# EAGLE board print (EAGLE 5.11)
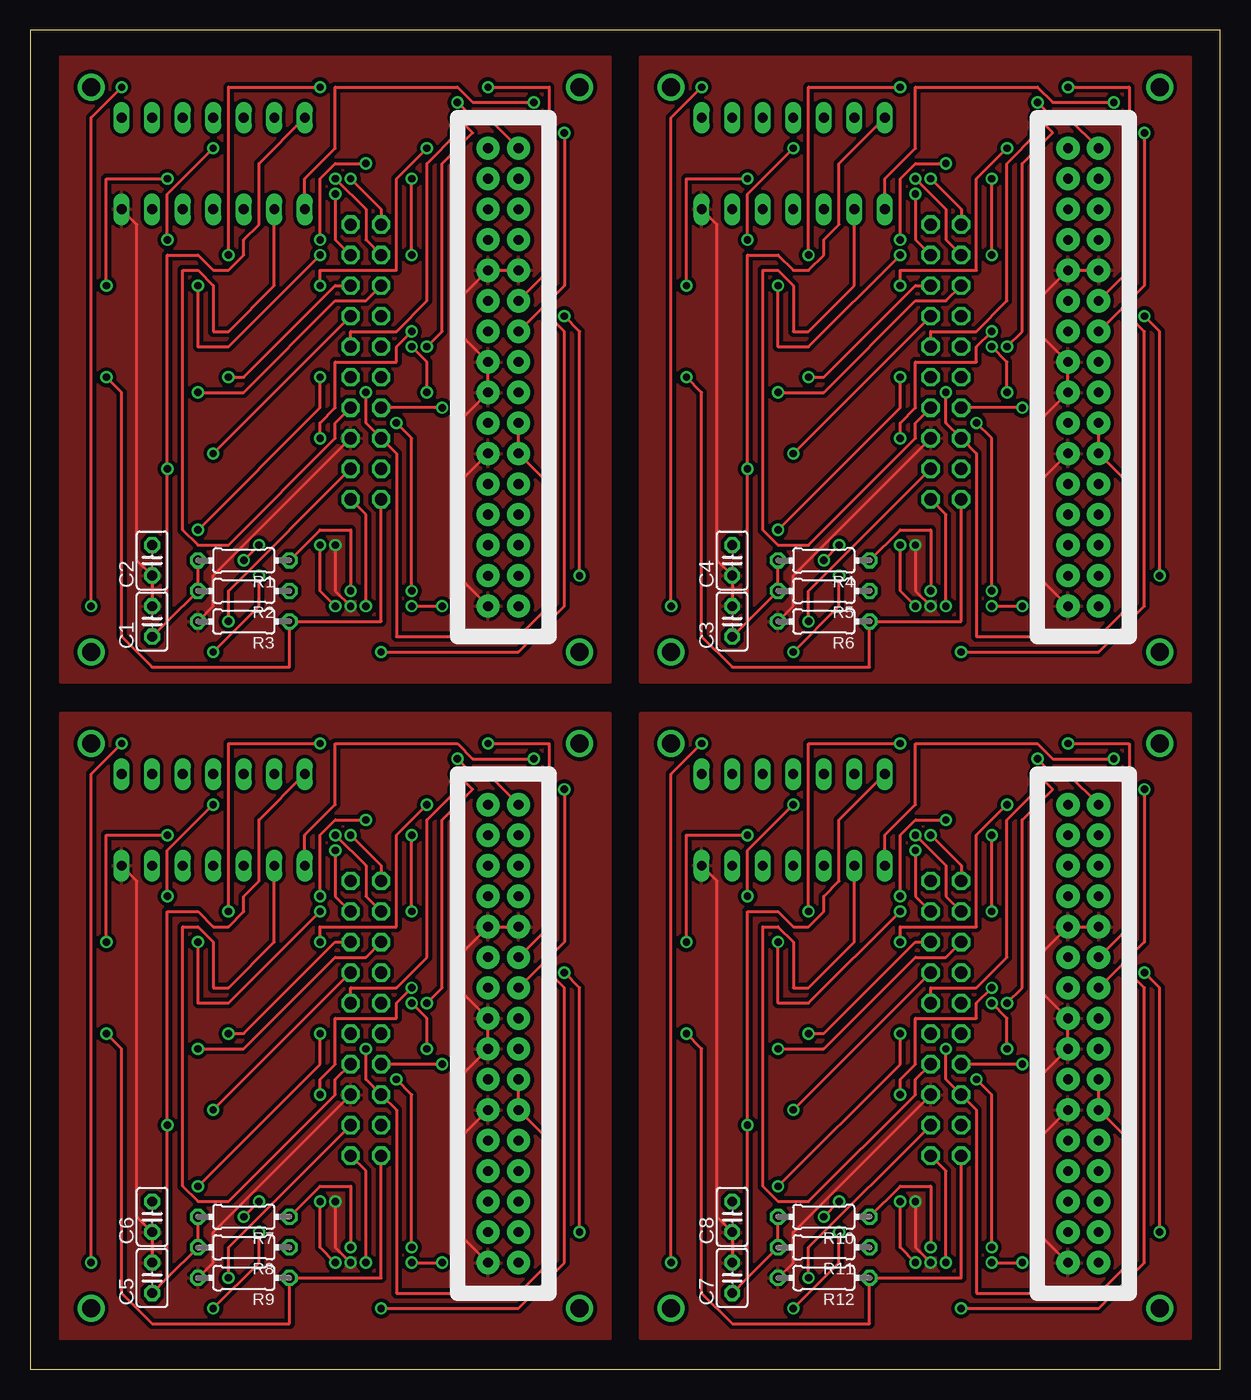
[diagram p0: board, top side]
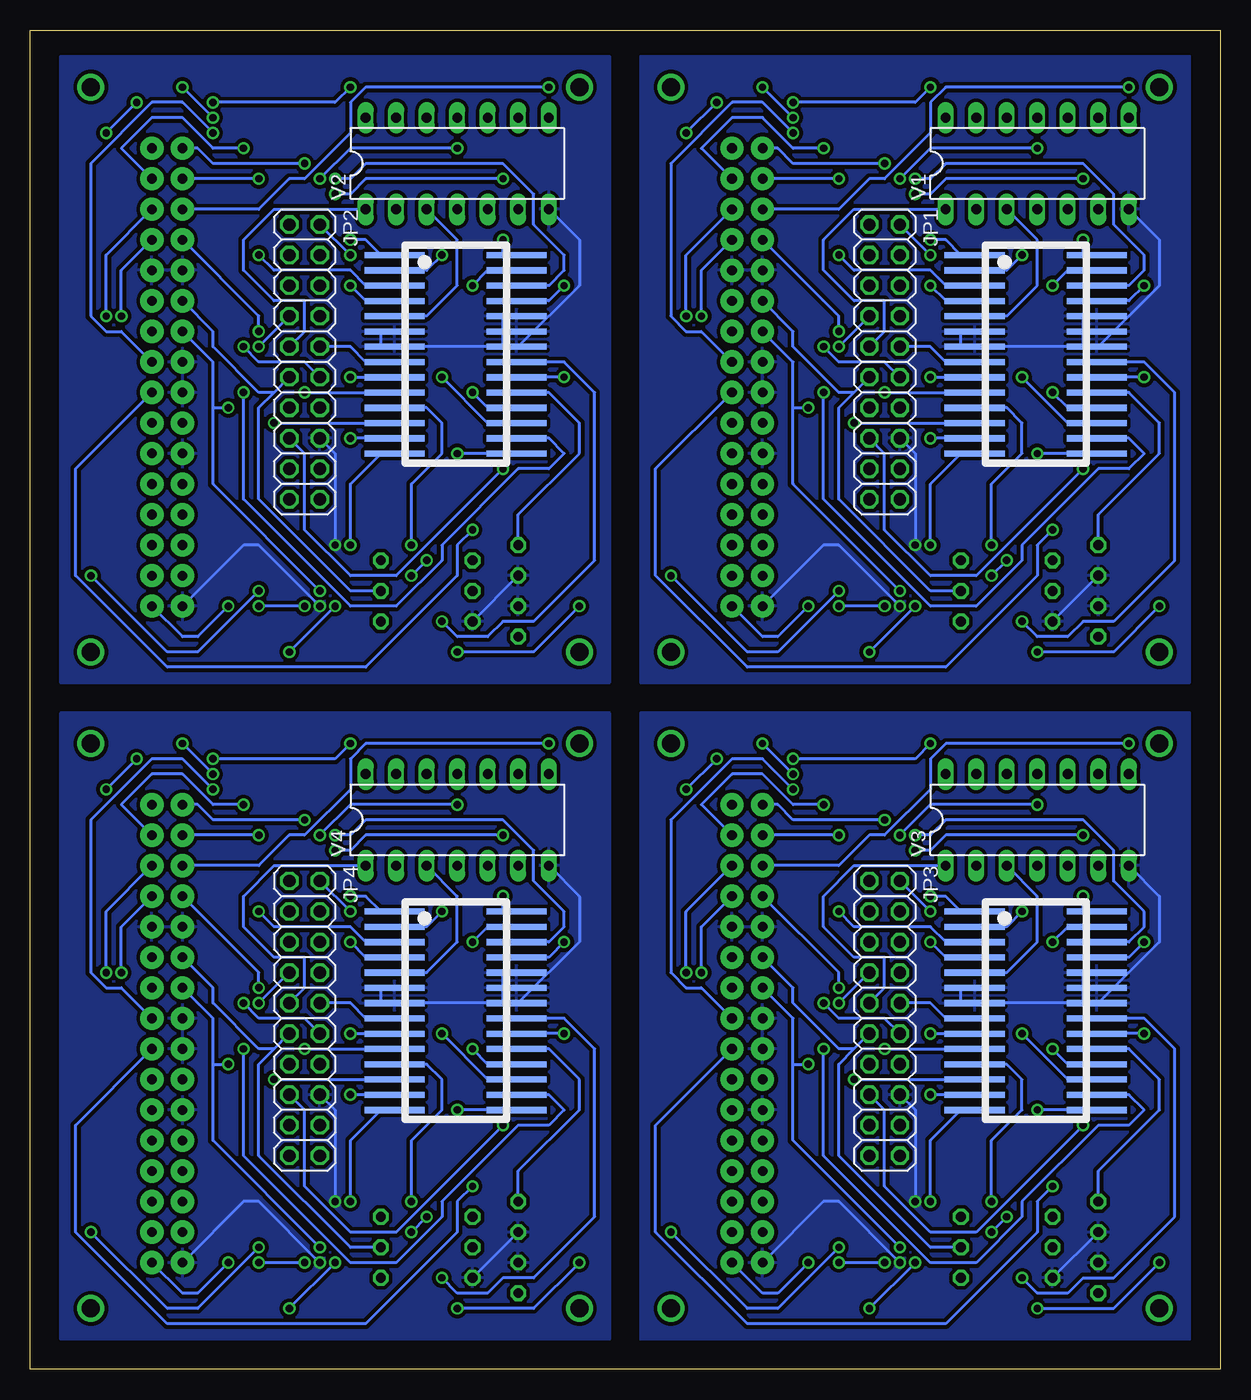
[diagram p1: board, bottom side, seen from below]

Size 99.04 x 111.43 mm. Coordinates in mm from the lower left corner, seen from the top.
Outline: 0,0 99.04,0 99.04,111.43 0,111.43 0,0
Copper layers (1*16): Top 0.035mm / dielectric 1.5mm / Bottom 0.035mm
Design rules "default": minimum track width 10mil, minimum drill 24mil, track to track 8mil, track to pad 8mil, pad to pad 8mil, via to via 8mil, smd to smd 8mil, copper to edge 40mil, drill to drill 8mil, minimum pad ring 10mil, minimum via ring 8mil, stop-mask expansion 4mil, vias tented up to drill 0mil, thermal gap 10mil

## Footprints (pad centres in the part's own frame; a part is rotated, then mirrored left to right if it is on the bottom)
C025-025X050 = drill 0.813 octagon: 1 -1.27,0; 2 1.27,0
2X10 = drill 1.016 octagon: 1 -11.43,-1.27; 2 -11.43,1.27; 3 -8.89,-1.27; 4 -8.89,1.27; 5 -6.35,-1.27; 6 -6.35,1.27; 7 -3.81,-1.27; 8 -3.81,1.27; 9 -1.27,-1.27; 10 -1.27,1.27; 11 1.27,-1.27; 12 1.27,1.27; 13 3.81,-1.27; 14 3.81,1.27; 15 6.35,-1.27; 16 6.35,1.27; 17 8.89,-1.27; 18 8.89,1.27; 19 11.43,-1.27; 20 11.43,1.27
0204/7 = drill 0.813 octagon: 1 -3.81,0; 2 3.81,0
AL422 = smd 5 x 0.51: 1 -5.21,7.61; 2 -5.21,6.34; 3 -5.21,5.07; 4 -5.21,3.8; 5 -5.21,2.53; 6 -5.21,1.26; 7 -5.21,-0.01; 8 -5.21,-1.28; 9 -5.21,-2.55; 10 -5.21,-3.82; 11 -5.21,-5.09; 12 -5.21,-6.36; 13 -5.21,-7.63; 14 -5.21,-8.9; 15 4.95,-8.9; 16 4.95,-7.63; 17 4.95,-6.36; 18 4.95,-5.09; 19 4.95,-3.82; 20 4.95,-2.55; 21 4.95,-1.28; 22 4.95,-0.01; 23 4.95,1.26; 24 4.95,2.53; 25 4.95,3.8; 26 4.95,5.07; 27 4.95,6.34; 28 4.95,7.61
C3088MODULE = drill 0.8 pad 1.93 round: P$1 -1.27,19.05; P$2 1.27,19.05; P$3 -1.27,16.51; P$4 1.27,16.51; P$5 -1.27,13.97; P$6 1.27,13.97; P$7 -1.27,11.43; P$8 1.27,11.43; P$9 -1.27,8.89; P$10 1.27,8.89; P$11 -1.27,6.35; P$12 1.27,6.35; P$13 -1.27,3.81; P$14 1.27,3.81; P$15 -1.27,1.27; P$16 1.27,1.27; P$17 -1.27,-1.27; P$18 1.27,-1.27; P$19 -1.27,-3.81; P$20 1.27,-3.81; P$21 -1.27,-6.35; P$22 1.27,-6.35; P$23 -1.27,-8.89; P$24 1.27,-8.89; P$25 -1.27,-11.43; P$26 1.27,-11.43; P$27 -1.27,-13.97; P$28 1.27,-13.97; P$29 -1.27,-16.51; P$30 1.27,-16.51; P$31 -1.27,-19.05; P$32 1.27,-19.05
DIL14 = drill 0.813 long: 1 -7.62,-3.81; 2 -5.08,-3.81; 3 -2.54,-3.81; 4 0,-3.81; 5 2.54,-3.81; 6 5.08,-3.81; 7 7.62,-3.81; 8 7.62,3.81; 9 5.08,3.81; 10 2.54,3.81; 11 0,3.81; 12 -2.54,3.81; 13 -5.08,3.81; 14 -7.62,3.81

## Placement (x,y rotation side)
C1  0.1uf  [C025-025X050]  10.16,62.23 90 top
C2  22uf  [C025-025X050]  10.16,67.31 90 top
C3  0.1uf  [C025-025X050]  58.42,62.23 90 top
C4  22uf  [C025-025X050]  58.42,67.31 90 top
C5  0.1uf  [C025-025X050]  10.16,7.62 90 top
C6  22uf  [C025-025X050]  10.16,12.7 90 top
C7  0.1uf  [C025-025X050]  58.42,7.62 90 top
C8  22uf  [C025-025X050]  58.42,12.7 90 top
JP1  [2X10]  27.94,83.82 270 bottom
JP2  [2X10]  76.2,83.82 270 bottom
JP3  [2X10]  27.94,29.21 270 bottom
JP4  [2X10]  76.2,29.21 270 bottom
R1  4k7  [0204/7]  17.78,67.31 180 top
R2  4k7  [0204/7]  17.78,64.77 180 top
R3  1k  [0204/7]  17.78,62.23 180 top
R4  4k7  [0204/7]  66.04,67.31 180 top
R5  4k7  [0204/7]  66.04,64.77 180 top
R6  1k  [0204/7]  66.04,62.23 180 top
R7  4k7  [0204/7]  17.78,12.7 180 top
R8  4k7  [0204/7]  17.78,10.16 180 top
R9  1k  [0204/7]  17.78,7.62 180 top
R10  4k7  [0204/7]  66.04,12.7 180 top
R11  4k7  [0204/7]  66.04,10.16 180 top
R12  1k  [0204/7]  66.04,7.62 180 top
U$1  AL422B  [AL422]  15.24,85.09 0 bottom
U$2  C3088MODULE  [C3088MODULE]  39.37,82.55 0 top
U$3  AL422B  [AL422]  63.5,85.09 0 bottom
U$4  C3088MODULE  [C3088MODULE]  87.63,82.55 0 top
U$5  AL422B  [AL422]  15.24,30.48 0 bottom
U$6  C3088MODULE  [C3088MODULE]  39.37,27.94 0 top
U$7  AL422B  [AL422]  63.5,30.48 0 bottom
U$8  C3088MODULE  [C3088MODULE]  87.63,27.94 0 top
V1  74HCT00N  [DIL14]  15.24,100.33 0 bottom
V2  74HCT00N  [DIL14]  63.5,100.33 0 bottom
V3  74HCT00N  [DIL14]  15.24,45.72 0 bottom
V4  74HCT00N  [DIL14]  63.5,45.72 0 bottom

## Library data of the parts
C1-C8 R1-R12 = rcl
JP1-JP4 = pinhead
U$1-U$8 = Tugas-Akhir-Sistem-Mikroprossesor
V1-V4 = 74ttl-din

## Nets
/FIFO_READ_RESET: JP1.18 U$1.21
/FIFO_READ_RESET1: JP2.18 U$3.21
/FIFO_READ_RESET2: JP3.18 U$5.21
/FIFO_READ_RESET3: JP4.18 U$7.21
DATA0: U$1.1 U$2.P$1
DATA1: U$1.2 U$2.P$2
DATA2: U$1.3 U$2.P$3
DATA3: U$1.4 U$2.P$4
DATA4: U$1.11 U$2.P$5
DATA5: U$1.12 U$2.P$6
DATA6: U$1.13 U$2.P$7
DATA7: U$1.14 U$2.P$8
DATA8: U$3.1 U$4.P$1
DATA9: U$3.2 U$4.P$2
DATA10: U$3.3 U$4.P$3
DATA11: U$3.4 U$4.P$4
DATA12: U$3.11 U$4.P$5
DATA13: U$3.12 U$4.P$6
DATA14: U$3.13 U$4.P$7
DATA15: U$3.14 U$4.P$8
DATA16: U$5.1 U$6.P$1
DATA17: U$5.2 U$6.P$2
DATA18: U$5.3 U$6.P$3
DATA19: U$5.4 U$6.P$4
DATA20: U$5.11 U$6.P$5
DATA21: U$5.12 U$6.P$6
DATA22: U$5.13 U$6.P$7
DATA23: U$5.14 U$6.P$8
DATA24: U$7.1 U$8.P$1
DATA25: U$7.2 U$8.P$2
DATA26: U$7.3 U$8.P$3
DATA27: U$7.4 U$8.P$4
DATA28: U$7.11 U$8.P$5
DATA29: U$7.12 U$8.P$6
DATA30: U$7.13 U$8.P$7
DATA31: U$7.14 U$8.P$8
FIFO_DATA_OUT0: JP1.1 U$1.28
FIFO_DATA_OUT1: JP1.2 U$1.27
FIFO_DATA_OUT2: JP1.3 U$1.26
FIFO_DATA_OUT3: JP1.4 U$1.25
FIFO_DATA_OUT4: JP1.5 U$1.18
FIFO_DATA_OUT5: JP1.6 U$1.17
FIFO_DATA_OUT6: JP1.7 U$1.16
FIFO_DATA_OUT7: JP1.8 U$1.15
FIFO_DATA_OUT8: JP2.1 U$3.28
FIFO_DATA_OUT9: JP2.2 U$3.27
FIFO_DATA_OUT10: JP2.3 U$3.26
FIFO_DATA_OUT11: JP2.4 U$3.25
FIFO_DATA_OUT12: JP2.5 U$3.18
FIFO_DATA_OUT13: JP2.6 U$3.17
FIFO_DATA_OUT14: JP2.7 U$3.16
FIFO_DATA_OUT15: JP2.8 U$3.15
FIFO_DATA_OUT16: JP3.1 U$5.28
FIFO_DATA_OUT17: JP3.2 U$5.27
FIFO_DATA_OUT18: JP3.3 U$5.26
FIFO_DATA_OUT19: JP3.4 U$5.25
FIFO_DATA_OUT20: JP3.5 U$5.18
FIFO_DATA_OUT21: JP3.6 U$5.17
FIFO_DATA_OUT22: JP3.7 U$5.16
FIFO_DATA_OUT23: JP3.8 U$5.15
FIFO_DATA_OUT24: JP4.1 U$7.28
FIFO_DATA_OUT25: JP4.2 U$7.27
FIFO_DATA_OUT26: JP4.3 U$7.26
FIFO_DATA_OUT27: JP4.4 U$7.25
FIFO_DATA_OUT28: JP4.5 U$7.18
FIFO_DATA_OUT29: JP4.6 U$7.17
FIFO_DATA_OUT30: JP4.7 U$7.16
FIFO_DATA_OUT31: JP4.8 U$7.15
FIFO_READ_CLOCK: JP1.19 R3.1 U$1.20
FIFO_READ_CLOCK1: JP2.19 R6.1 U$3.20
FIFO_READ_CLOCK2: JP3.19 R9.1 U$5.20
FIFO_READ_CLOCK3: JP4.19 R12.1 U$7.20
FIFO_WRITE_ENABLE: JP1.14 V1.2
FIFO_WRITE_ENABLE1: JP2.14 V2.2
FIFO_WRITE_ENABLE2: JP3.14 V3.2
FIFO_WRITE_ENABLE3: JP4.14 V4.2
GND: C1.2 C2.1 JP1.16 R3.2 U$1.6 U$1.7 U$1.22 U$1.23 U$1.24 U$2.P$9 U$2.P$10 U$2.P$15 U$2.P$17 U$2.P$21 U$2.P$31 V1.7
GND1: C3.2 C4.1 JP2.16 R6.2 U$3.6 U$3.7 U$3.22 U$3.23 U$3.24 U$4.P$9 U$4.P$10 U$4.P$15 U$4.P$17 U$4.P$21 U$4.P$31 V2.7
GND2: C5.2 C6.1 JP3.16 R9.2 U$5.6 U$5.7 U$5.22 U$5.23 U$5.24 U$6.P$9 U$6.P$10 U$6.P$15 U$6.P$17 U$6.P$21 U$6.P$31 V3.7
GND3: C7.2 C8.1 JP4.16 R12.2 U$7.6 U$7.7 U$7.22 U$7.23 U$7.24 U$8.P$9 U$8.P$10 U$8.P$15 U$8.P$17 U$8.P$21 U$8.P$31 V4.7
HORIZONTAL_REFERENCE: JP1.9 U$2.P$14 V1.1
HORIZONTAL_REFERENCE1: JP2.9 U$4.P$14 V2.1
HORIZONTAL_REFERENCE2: JP3.9 U$6.P$14 V3.1
HORIZONTAL_REFERENCE3: JP4.9 U$8.P$14 V4.1
N$1: JP1.20 U$2.P$32
N$2: U$1.5 V1.3
N$3: U$1.9 U$2.P$18
N$10: C2.2 U$1.19
N$11: U$3.5 V2.3
N$12: U$3.9 U$4.P$18
N$13: C4.2 U$3.19
N$14: JP2.20 U$4.P$32
N$21: U$5.5 V3.3
N$22: U$5.9 U$6.P$18
N$23: C6.2 U$5.19
N$24: JP3.20 U$6.P$32
N$31: U$7.5 V4.3
N$32: U$7.9 U$8.P$18
N$33: C8.2 U$7.19
N$34: JP4.20 U$8.P$32
OV6620_FODD: JP1.12 U$2.P$12
OV6620_FODD1: JP2.12 U$4.P$12
OV6620_FODD2: JP3.12 U$6.P$12
OV6620_FODD3: JP4.12 U$8.P$12
OV6620_SCL: JP1.13 R1.1 U$2.P$13
OV6620_SCL1: JP2.13 R4.1 U$4.P$13
OV6620_SCL2: JP3.13 R7.1 U$6.P$13
OV6620_SCL3: JP4.13 R10.1 U$8.P$13
OV6620_SDA: JP1.11 R2.1 U$2.P$11
OV6620_SDA1: JP2.11 R5.1 U$4.P$11
OV6620_SDA2: JP3.11 R8.1 U$6.P$11
OV6620_SDA3: JP4.11 R11.1 U$8.P$11
VCC: C1.1 JP1.15 R1.2 R2.2 U$1.10 U$2.P$20 U$2.P$22 V1.14
VCC1: C3.1 JP2.15 R4.2 R5.2 U$3.10 U$4.P$20 U$4.P$22 V2.14
VCC2: C5.1 JP3.15 R7.2 R8.2 U$5.10 U$6.P$20 U$6.P$22 V3.14
VCC3: C7.1 JP4.15 R10.2 R11.2 U$7.10 U$8.P$20 U$8.P$22 V4.14
VERTICAL_SYNCRONIZATION: JP1.10 U$1.8 U$2.P$16
VERTICAL_SYNCRONIZATION1: JP2.10 U$3.8 U$4.P$16
VERTICAL_SYNCRONIZATION2: JP3.10 U$5.8 U$6.P$16
VERTICAL_SYNCRONIZATION3: JP4.10 U$7.8 U$8.P$16

## Tracks (layer width: path | path; a pad name or v marks a point on that pad's centre or on a via)
/FIFO_READ_RESET  (via drill 0.61)
  Top 0.254: JP1.18 16.51,64.77 v16.51,62.23
  Bottom 0.254: v16.51,62.23 15.24,60.96 12.7,60.96 11.43,62.23 8.89,62.23 3.81,67.31 3.81,81.28 6.35,83.82 10.16,83.82 U$1.21
/FIFO_READ_RESET1  (via drill 0.61)
  Top 0.254: JP2.18 64.77,64.77 v64.77,62.23
  Bottom 0.254: v64.77,62.23 63.5,60.96 60.96,60.96 59.69,62.23 57.15,62.23 52.07,67.31 52.07,81.28 54.61,83.82 58.42,83.82 U$3.21
/FIFO_READ_RESET2  (via drill 0.61)
  Top 0.254: JP3.18 16.51,10.16 v16.51,7.62
  Bottom 0.254: v16.51,7.62 15.24,6.35 12.7,6.35 11.43,7.62 8.89,7.62 3.81,12.7 3.81,26.67 6.35,29.21 10.16,29.21 U$5.21
/FIFO_READ_RESET3  (via drill 0.61)
  Top 0.254: JP4.18 64.77,10.16 v64.77,7.62
  Bottom 0.254: v64.77,7.62 63.5,6.35 60.96,6.35 59.69,7.62 57.15,7.62 52.07,12.7 52.07,26.67 54.61,29.21 58.42,29.21 U$7.21
DATA0  (via drill 0.61)
  Top 0.254: v27.94,100.33 25.4,100.33 24.13,99.06 v24.13,93.98
  Bottom 0.254: U$2.P$1 36.83,101.6 35.56,100.33 v27.94,100.33 | v24.13,93.98 22.86,93.98 21.59,92.71 U$1.1
DATA1  (via drill 0.61)
  Top 0.254: U$2.P$2 38.1,104.14 36.83,104.14 v35.56,105.41 | v24.13,106.68 16.51,106.68 v16.51,92.71
  Bottom 0.254: v35.56,105.41 25.4,105.41 v24.13,106.68 | v16.51,92.71 17.78,91.44 20.32,91.44 U$1.2
DATA2  (via drill 0.61)
  Top 0.254: v31.75,92.71 v31.75,99.06
  Bottom 0.254: v31.75,99.06 U$2.P$3 | v31.75,92.71 30.48,91.44 24.13,91.44 22.86,90.17 21.59,90.17 U$1.3
DATA3  (via drill 0.61)
  Top 0.254: v33.02,101.6 30.48,99.06 30.48,91.44 24.13,91.44 v24.13,90.17
  Bottom 0.254: U$2.P$4 43.18,101.6 40.64,104.14 38.1,104.14 35.56,101.6 v33.02,101.6 | v24.13,90.17 22.86,88.9 21.59,88.9 U$1.4
DATA4  (via drill 0.61)
  Top 0.254: v7.62,106.68 5.08,104.14 v5.08,63.5 | v15.24,59.69 19.05,63.5 v19.05,66.04 | v17.78,67.31 v19.05,68.58
  Bottom 0.254: U$2.P$5 31.75,96.52 29.21,99.06 27.94,99.06 24.13,102.87 24.13,105.41 22.86,106.68 v7.62,106.68 | v5.08,63.5 8.89,59.69 v15.24,59.69 | v19.05,66.04 v17.78,67.31 | v19.05,68.58 19.05,73.66 16.51,76.2 16.51,78.74 17.78,80.01 20.32,80.01 U$1.11
DATA5  (via drill 0.61)
  Top 0.254: v44.45,87.63 45.72,86.36 v45.72,66.04 | v31.75,64.77 31.75,77.47 v30.48,78.74
  Bottom 0.254: U$2.P$6 44.45,92.71 v44.45,87.63 | v45.72,66.04 39.37,59.69 36.83,59.69 v31.75,64.77 | v30.48,78.74 21.59,78.74 U$1.12
DATA6  (via drill 0.61)
  Top 0.254: v31.75,86.36 30.48,85.09 30.48,83.82 25.4,83.82 25.4,80.01 24.13,78.74 v24.13,77.47
  Bottom 0.254: U$2.P$7 31.75,87.63 v31.75,86.36 | v24.13,77.47 21.59,77.47 U$1.13
DATA7  (via drill 0.61)
  Top 0.254: v43.18,87.63 44.45,86.36 44.45,63.5 40.64,59.69 v29.21,59.69 | v25.4,63.5 24.13,64.77 v24.13,68.58
  Bottom 0.254: U$2.P$8 43.18,91.44 v43.18,87.63 | v29.21,59.69 v25.4,63.5 | v24.13,68.58 24.13,73.66 21.59,76.2 U$1.14
DATA8  (via drill 0.61)
  Top 0.254: v76.2,100.33 73.66,100.33 72.39,99.06 v72.39,93.98
  Bottom 0.254: U$4.P$1 85.09,101.6 83.82,100.33 v76.2,100.33 | v72.39,93.98 71.12,93.98 69.85,92.71 U$3.1
DATA9  (via drill 0.61)
  Top 0.254: U$4.P$2 86.36,104.14 85.09,104.14 v83.82,105.41 | v72.39,106.68 64.77,106.68 v64.77,92.71
  Bottom 0.254: v83.82,105.41 73.66,105.41 v72.39,106.68 | v64.77,92.71 66.04,91.44 68.58,91.44 U$3.2
DATA10  (via drill 0.61)
  Top 0.254: v80.01,92.71 v80.01,99.06
  Bottom 0.254: v80.01,99.06 U$4.P$3 | v80.01,92.71 78.74,91.44 72.39,91.44 71.12,90.17 69.85,90.17 U$3.3
DATA11  (via drill 0.61)
  Top 0.254: v81.28,101.6 78.74,99.06 78.74,91.44 72.39,91.44 v72.39,90.17
  Bottom 0.254: U$4.P$4 91.44,101.6 88.9,104.14 86.36,104.14 83.82,101.6 v81.28,101.6 | v72.39,90.17 71.12,88.9 69.85,88.9 U$3.4
DATA12  (via drill 0.61)
  Top 0.254: v55.88,106.68 53.34,104.14 v53.34,63.5 | v63.5,59.69 67.31,63.5 v67.31,66.04 | v66.04,67.31 v67.31,68.58
  Bottom 0.254: U$4.P$5 80.01,96.52 77.47,99.06 76.2,99.06 72.39,102.87 72.39,105.41 71.12,106.68 v55.88,106.68 | v53.34,63.5 57.15,59.69 v63.5,59.69 | v67.31,66.04 v66.04,67.31 | v67.31,68.58 67.31,73.66 64.77,76.2 64.77,78.74 66.04,80.01 68.58,80.01 U$3.11
DATA13  (via drill 0.61)
  Top 0.254: v92.71,87.63 93.98,86.36 v93.98,66.04 | v80.01,64.77 80.01,77.47 v78.74,78.74
  Bottom 0.254: U$4.P$6 92.71,92.71 v92.71,87.63 | v93.98,66.04 87.63,59.69 85.09,59.69 v80.01,64.77 | v78.74,78.74 69.85,78.74 U$3.12
DATA14  (via drill 0.61)
  Top 0.254: v80.01,86.36 78.74,85.09 78.74,83.82 73.66,83.82 73.66,80.01 72.39,78.74 v72.39,77.47
  Bottom 0.254: U$4.P$7 80.01,87.63 v80.01,86.36 | v72.39,77.47 69.85,77.47 U$3.13
DATA15  (via drill 0.61)
  Top 0.254: v91.44,87.63 92.71,86.36 92.71,63.5 88.9,59.69 v77.47,59.69 | v73.66,63.5 72.39,64.77 v72.39,68.58
  Bottom 0.254: U$4.P$8 91.44,91.44 v91.44,87.63 | v77.47,59.69 v73.66,63.5 | v72.39,68.58 72.39,73.66 69.85,76.2 U$3.14
DATA16  (via drill 0.61)
  Top 0.254: v27.94,45.72 25.4,45.72 24.13,44.45 v24.13,39.37
  Bottom 0.254: U$6.P$1 36.83,46.99 35.56,45.72 v27.94,45.72 | v24.13,39.37 22.86,39.37 21.59,38.1 U$5.1
DATA17  (via drill 0.61)
  Top 0.254: U$6.P$2 38.1,49.53 36.83,49.53 v35.56,50.8 | v24.13,52.07 16.51,52.07 v16.51,38.1
  Bottom 0.254: v35.56,50.8 25.4,50.8 v24.13,52.07 | v16.51,38.1 17.78,36.83 20.32,36.83 U$5.2
DATA18  (via drill 0.61)
  Top 0.254: v31.75,38.1 v31.75,44.45
  Bottom 0.254: v31.75,44.45 U$6.P$3 | v31.75,38.1 30.48,36.83 24.13,36.83 22.86,35.56 21.59,35.56 U$5.3
DATA19  (via drill 0.61)
  Top 0.254: v33.02,46.99 30.48,44.45 30.48,36.83 24.13,36.83 v24.13,35.56
  Bottom 0.254: U$6.P$4 43.18,46.99 40.64,49.53 38.1,49.53 35.56,46.99 v33.02,46.99 | v24.13,35.56 22.86,34.29 21.59,34.29 U$5.4
DATA20  (via drill 0.61)
  Top 0.254: v7.62,52.07 5.08,49.53 v5.08,8.89 | v15.24,5.08 19.05,8.89 v19.05,11.43 | v17.78,12.7 v19.05,13.97
  Bottom 0.254: U$6.P$5 31.75,41.91 29.21,44.45 27.94,44.45 24.13,48.26 24.13,50.8 22.86,52.07 v7.62,52.07 | v5.08,8.89 8.89,5.08 v15.24,5.08 | v19.05,11.43 v17.78,12.7 | v19.05,13.97 19.05,19.05 16.51,21.59 16.51,24.13 17.78,25.4 20.32,25.4 U$5.11
DATA21  (via drill 0.61)
  Top 0.254: v44.45,33.02 45.72,31.75 v45.72,11.43 | v31.75,10.16 31.75,22.86 v30.48,24.13
  Bottom 0.254: U$6.P$6 44.45,38.1 v44.45,33.02 | v45.72,11.43 39.37,5.08 36.83,5.08 v31.75,10.16 | v30.48,24.13 21.59,24.13 U$5.12
DATA22  (via drill 0.61)
  Top 0.254: v31.75,31.75 30.48,30.48 30.48,29.21 25.4,29.21 25.4,25.4 24.13,24.13 v24.13,22.86
  Bottom 0.254: U$6.P$7 31.75,33.02 v31.75,31.75 | v24.13,22.86 21.59,22.86 U$5.13
DATA23  (via drill 0.61)
  Top 0.254: v43.18,33.02 44.45,31.75 44.45,8.89 40.64,5.08 v29.21,5.08 | v25.4,8.89 24.13,10.16 v24.13,13.97
  Bottom 0.254: U$6.P$8 43.18,36.83 v43.18,33.02 | v29.21,5.08 v25.4,8.89 | v24.13,13.97 24.13,19.05 21.59,21.59 U$5.14
DATA24  (via drill 0.61)
  Top 0.254: v76.2,45.72 73.66,45.72 72.39,44.45 v72.39,39.37
  Bottom 0.254: U$8.P$1 85.09,46.99 83.82,45.72 v76.2,45.72 | v72.39,39.37 71.12,39.37 69.85,38.1 U$7.1
DATA25  (via drill 0.61)
  Top 0.254: U$8.P$2 86.36,49.53 85.09,49.53 v83.82,50.8 | v72.39,52.07 64.77,52.07 v64.77,38.1
  Bottom 0.254: v83.82,50.8 73.66,50.8 v72.39,52.07 | v64.77,38.1 66.04,36.83 68.58,36.83 U$7.2
DATA26  (via drill 0.61)
  Top 0.254: v80.01,38.1 v80.01,44.45
  Bottom 0.254: v80.01,44.45 U$8.P$3 | v80.01,38.1 78.74,36.83 72.39,36.83 71.12,35.56 69.85,35.56 U$7.3
DATA27  (via drill 0.61)
  Top 0.254: v81.28,46.99 78.74,44.45 78.74,36.83 72.39,36.83 v72.39,35.56
  Bottom 0.254: U$8.P$4 91.44,46.99 88.9,49.53 86.36,49.53 83.82,46.99 v81.28,46.99 | v72.39,35.56 71.12,34.29 69.85,34.29 U$7.4
DATA28  (via drill 0.61)
  Top 0.254: v55.88,52.07 53.34,49.53 v53.34,8.89 | v63.5,5.08 67.31,8.89 v67.31,11.43 | v66.04,12.7 v67.31,13.97
  Bottom 0.254: U$8.P$5 80.01,41.91 77.47,44.45 76.2,44.45 72.39,48.26 72.39,50.8 71.12,52.07 v55.88,52.07 | v53.34,8.89 57.15,5.08 v63.5,5.08 | v67.31,11.43 v66.04,12.7 | v67.31,13.97 67.31,19.05 64.77,21.59 64.77,24.13 66.04,25.4 68.58,25.4 U$7.11
DATA29  (via drill 0.61)
  Top 0.254: v92.71,33.02 93.98,31.75 v93.98,11.43 | v80.01,10.16 80.01,22.86 v78.74,24.13
  Bottom 0.254: U$8.P$6 92.71,38.1 v92.71,33.02 | v93.98,11.43 87.63,5.08 85.09,5.08 v80.01,10.16 | v78.74,24.13 69.85,24.13 U$7.12
DATA30  (via drill 0.61)
  Top 0.254: v80.01,31.75 78.74,30.48 78.74,29.21 73.66,29.21 73.66,25.4 72.39,24.13 v72.39,22.86
  Bottom 0.254: U$8.P$7 80.01,33.02 v80.01,31.75 | v72.39,22.86 69.85,22.86 U$7.13
DATA31  (via drill 0.61)
  Top 0.254: v91.44,33.02 92.71,31.75 92.71,8.89 88.9,5.08 v77.47,5.08 | v73.66,8.89 72.39,10.16 v72.39,13.97
  Bottom 0.254: U$8.P$8 91.44,36.83 v91.44,33.02 | v77.47,5.08 v73.66,8.89 | v72.39,13.97 72.39,19.05 69.85,21.59 U$7.14
FIFO_DATA_OUT0  (via drill 0.61)
  Top 0.254: JP1.1 29.21,96.52 v26.67,99.06 | v15.24,101.6 11.43,97.79 v11.43,93.98
  Bottom 0.254: v26.67,99.06 24.13,101.6 v15.24,101.6 | v11.43,93.98 11.43,92.71 U$1.28
FIFO_DATA_OUT1  (via drill 0.61)
  Top 0.254: v24.13,92.71 16.51,85.09 13.97,85.09 v13.97,90.17
  Bottom 0.254: v24.13,92.71 JP1.2 | v13.97,90.17 12.7,91.44 11.43,91.44 U$1.27
FIFO_DATA_OUT2  (via drill 0.61)
  Top 0.254: JP1.3 27.94,93.98 27.94,96.52 v25.4,99.06
  Bottom 0.254: v25.4,99.06 24.13,99.06 22.86,100.33 11.43,100.33 8.89,97.79 8.89,95.25 6.35,92.71 6.35,91.44 7.62,90.17 10.16,90.17 U$1.26
FIFO_DATA_OUT3  (via drill 0.61)
  Top 0.254: JP1.4 25.4,93.98 v25.4,97.79 | v11.43,99.06 6.35,99.06 v6.35,90.17
  Bottom 0.254: v25.4,97.79 24.13,97.79 22.86,99.06 v11.43,99.06 | v6.35,90.17 7.62,88.9 10.16,88.9 U$1.25
FIFO_DATA_OUT4  (via drill 0.61)
  Top 0.254: JP1.5 27.94,88.9 25.4,88.9 17.78,81.28 v13.97,81.28
  Bottom 0.254: v13.97,81.28 12.7,80.01 11.43,80.01 U$1.18
FIFO_DATA_OUT5  (via drill 0.61)
  Top 0.254: JP1.6 25.4,90.17 17.78,82.55 v16.51,82.55
  Bottom 0.254: v16.51,82.55 12.7,78.74 11.43,78.74 U$1.17
FIFO_DATA_OUT6  (via drill 0.61)
  Top 0.254: v31.75,85.09 33.02,83.82 v33.02,81.28
  Bottom 0.254: v31.75,85.09 JP1.7 | v33.02,81.28 33.02,72.39 24.13,63.5 20.32,63.5 16.51,67.31 16.51,68.58 10.16,74.93 7.62,74.93 6.35,76.2 7.62,77.47 10.16,77.47 U$1.16
FIFO_DATA_OUT7  (via drill 0.61)
  Top 0.254: v15.24,76.2 JP1.8
  Bottom 0.254: v15.24,76.2 11.43,76.2 U$1.15
FIFO_DATA_OUT8  (via drill 0.61)
  Top 0.254: JP2.1 77.47,96.52 v74.93,99.06 | v63.5,101.6 59.69,97.79 v59.69,93.98
  Bottom 0.254: v74.93,99.06 72.39,101.6 v63.5,101.6 | v59.69,93.98 59.69,92.71 U$3.28
FIFO_DATA_OUT9  (via drill 0.61)
  Top 0.254: v72.39,92.71 64.77,85.09 62.23,85.09 v62.23,90.17
  Bottom 0.254: v72.39,92.71 JP2.2 | v62.23,90.17 60.96,91.44 59.69,91.44 U$3.27
FIFO_DATA_OUT10  (via drill 0.61)
  Top 0.254: JP2.3 76.2,93.98 76.2,96.52 v73.66,99.06
  Bottom 0.254: v73.66,99.06 72.39,99.06 71.12,100.33 59.69,100.33 57.15,97.79 57.15,95.25 54.61,92.71 54.61,91.44 55.88,90.17 58.42,90.17 U$3.26
FIFO_DATA_OUT11  (via drill 0.61)
  Top 0.254: JP2.4 73.66,93.98 v73.66,97.79 | v59.69,99.06 54.61,99.06 v54.61,90.17
  Bottom 0.254: v73.66,97.79 72.39,97.79 71.12,99.06 v59.69,99.06 | v54.61,90.17 55.88,88.9 58.42,88.9 U$3.25
FIFO_DATA_OUT12  (via drill 0.61)
  Top 0.254: JP2.5 76.2,88.9 73.66,88.9 66.04,81.28 v62.23,81.28
  Bottom 0.254: v62.23,81.28 60.96,80.01 59.69,80.01 U$3.18
FIFO_DATA_OUT13  (via drill 0.61)
  Top 0.254: JP2.6 73.66,90.17 66.04,82.55 v64.77,82.55
  Bottom 0.254: v64.77,82.55 60.96,78.74 59.69,78.74 U$3.17
FIFO_DATA_OUT14  (via drill 0.61)
  Top 0.254: v80.01,85.09 81.28,83.82 v81.28,81.28
  Bottom 0.254: v80.01,85.09 JP2.7 | v81.28,81.28 81.28,72.39 72.39,63.5 68.58,63.5 64.77,67.31 64.77,68.58 58.42,74.93 55.88,74.93 54.61,76.2 55.88,77.47 58.42,77.47 U$3.16
FIFO_DATA_OUT15  (via drill 0.61)
  Top 0.254: v63.5,76.2 JP2.8
  Bottom 0.254: v63.5,76.2 59.69,76.2 U$3.15
FIFO_DATA_OUT16  (via drill 0.61)
  Top 0.254: JP3.1 29.21,41.91 v26.67,44.45 | v15.24,46.99 11.43,43.18 v11.43,39.37
  Bottom 0.254: v26.67,44.45 24.13,46.99 v15.24,46.99 | v11.43,39.37 11.43,38.1 U$5.28
FIFO_DATA_OUT17  (via drill 0.61)
  Top 0.254: v24.13,38.1 16.51,30.48 13.97,30.48 v13.97,35.56
  Bottom 0.254: v24.13,38.1 JP3.2 | v13.97,35.56 12.7,36.83 11.43,36.83 U$5.27
FIFO_DATA_OUT18  (via drill 0.61)
  Top 0.254: JP3.3 27.94,39.37 27.94,41.91 v25.4,44.45
  Bottom 0.254: v25.4,44.45 24.13,44.45 22.86,45.72 11.43,45.72 8.89,43.18 8.89,40.64 6.35,38.1 6.35,36.83 7.62,35.56 10.16,35.56 U$5.26
FIFO_DATA_OUT19  (via drill 0.61)
  Top 0.254: JP3.4 25.4,39.37 v25.4,43.18 | v11.43,44.45 6.35,44.45 v6.35,35.56
  Bottom 0.254: v25.4,43.18 24.13,43.18 22.86,44.45 v11.43,44.45 | v6.35,35.56 7.62,34.29 10.16,34.29 U$5.25
FIFO_DATA_OUT20  (via drill 0.61)
  Top 0.254: JP3.5 27.94,34.29 25.4,34.29 17.78,26.67 v13.97,26.67
  Bottom 0.254: v13.97,26.67 12.7,25.4 11.43,25.4 U$5.18
FIFO_DATA_OUT21  (via drill 0.61)
  Top 0.254: JP3.6 25.4,35.56 17.78,27.94 v16.51,27.94
  Bottom 0.254: v16.51,27.94 12.7,24.13 11.43,24.13 U$5.17
FIFO_DATA_OUT22  (via drill 0.61)
  Top 0.254: v31.75,30.48 33.02,29.21 v33.02,26.67
  Bottom 0.254: v31.75,30.48 JP3.7 | v33.02,26.67 33.02,17.78 24.13,8.89 20.32,8.89 16.51,12.7 16.51,13.97 10.16,20.32 7.62,20.32 6.35,21.59 7.62,22.86 10.16,22.86 U$5.16
FIFO_DATA_OUT23  (via drill 0.61)
  Top 0.254: v15.24,21.59 JP3.8
  Bottom 0.254: v15.24,21.59 11.43,21.59 U$5.15
FIFO_DATA_OUT24  (via drill 0.61)
  Top 0.254: JP4.1 77.47,41.91 v74.93,44.45 | v63.5,46.99 59.69,43.18 v59.69,39.37
  Bottom 0.254: v74.93,44.45 72.39,46.99 v63.5,46.99 | v59.69,39.37 59.69,38.1 U$7.28
FIFO_DATA_OUT25  (via drill 0.61)
  Top 0.254: v72.39,38.1 64.77,30.48 62.23,30.48 v62.23,35.56
  Bottom 0.254: v72.39,38.1 JP4.2 | v62.23,35.56 60.96,36.83 59.69,36.83 U$7.27
FIFO_DATA_OUT26  (via drill 0.61)
  Top 0.254: JP4.3 76.2,39.37 76.2,41.91 v73.66,44.45
  Bottom 0.254: v73.66,44.45 72.39,44.45 71.12,45.72 59.69,45.72 57.15,43.18 57.15,40.64 54.61,38.1 54.61,36.83 55.88,35.56 58.42,35.56 U$7.26
FIFO_DATA_OUT27  (via drill 0.61)
  Top 0.254: JP4.4 73.66,39.37 v73.66,43.18 | v59.69,44.45 54.61,44.45 v54.61,35.56
  Bottom 0.254: v73.66,43.18 72.39,43.18 71.12,44.45 v59.69,44.45 | v54.61,35.56 55.88,34.29 58.42,34.29 U$7.25
FIFO_DATA_OUT28  (via drill 0.61)
  Top 0.254: JP4.5 76.2,34.29 73.66,34.29 66.04,26.67 v62.23,26.67
  Bottom 0.254: v62.23,26.67 60.96,25.4 59.69,25.4 U$7.18
FIFO_DATA_OUT29  (via drill 0.61)
  Top 0.254: JP4.6 73.66,35.56 66.04,27.94 v64.77,27.94
  Bottom 0.254: v64.77,27.94 60.96,24.13 59.69,24.13 U$7.17
FIFO_DATA_OUT30  (via drill 0.61)
  Top 0.254: v80.01,30.48 81.28,29.21 v81.28,26.67
  Bottom 0.254: v80.01,30.48 JP4.7 | v81.28,26.67 81.28,17.78 72.39,8.89 68.58,8.89 64.77,12.7 64.77,13.97 58.42,20.32 55.88,20.32 54.61,21.59 55.88,22.86 58.42,22.86 U$7.16
FIFO_DATA_OUT31  (via drill 0.61)
  Top 0.254: v63.5,21.59 JP4.8
  Bottom 0.254: v63.5,21.59 59.69,21.59 U$7.15
FIFO_READ_CLOCK  (via drill 0.61)
  Top 0.254: JP1.19 29.21,62.23 R3.1 21.59,58.42 10.16,58.42 7.62,60.96 7.62,81.28 v6.35,82.55
  Bottom 0.254: v6.35,82.55 10.16,82.55 U$1.20
FIFO_READ_CLOCK1  (via drill 0.61)
  Top 0.254: JP2.19 77.47,62.23 R6.1 69.85,58.42 58.42,58.42 55.88,60.96 55.88,81.28 v54.61,82.55
  Bottom 0.254: v54.61,82.55 58.42,82.55 U$3.20
FIFO_READ_CLOCK2  (via drill 0.61)
  Top 0.254: JP3.19 29.21,7.62 R9.1 21.59,3.81 10.16,3.81 7.62,6.35 7.62,26.67 v6.35,27.94
  Bottom 0.254: v6.35,27.94 10.16,27.94 U$5.20
FIFO_READ_CLOCK3  (via drill 0.61)
  Top 0.254: JP4.19 77.47,7.62 R12.1 69.85,3.81 58.42,3.81 55.88,6.35 55.88,26.67 v54.61,27.94
  Bottom 0.254: v54.61,27.94 58.42,27.94 U$7.20
FIFO_WRITE_ENABLE
  Top 0.254: V1.2 20.32,90.17 16.51,86.36 15.24,86.36 15.24,90.17 13.97,91.44 12.7,91.44 12.7,69.85 13.97,68.58 16.51,68.58 25.4,77.47 25.4,78.74 JP1.14
FIFO_WRITE_ENABLE1
  Top 0.254: V2.2 68.58,90.17 64.77,86.36 63.5,86.36 63.5,90.17 62.23,91.44 60.96,91.44 60.96,69.85 62.23,68.58 64.77,68.58 73.66,77.47 73.66,78.74 JP2.14
FIFO_WRITE_ENABLE2
  Top 0.254: V3.2 20.32,35.56 16.51,31.75 15.24,31.75 15.24,35.56 13.97,36.83 12.7,36.83 12.7,15.24 13.97,13.97 16.51,13.97 25.4,22.86 25.4,24.13 JP3.14
FIFO_WRITE_ENABLE3
  Top 0.254: V4.2 68.58,35.56 64.77,31.75 63.5,31.75 63.5,35.56 62.23,36.83 60.96,36.83 60.96,15.24 62.23,13.97 64.77,13.97 73.66,22.86 73.66,24.13 JP4.14
GND  (via drill 0.61)
  Top 0.254: U$2.P$10 U$2.P$9 35.56,88.9 35.56,86.36 U$2.P$15 U$2.P$17 35.56,78.74 35.56,73.66 | U$2.P$31 35.56,66.04 35.56,73.66 | 35.56,73.66 U$2.P$21 | C1.2 C2.1 8.89,67.31 8.89,95.25 V1.7 | JP1.16 15.24,66.04 15.24,63.5 R3.2 | v26.67,63.5 25.4,64.77 v25.4,68.58
  Bottom 0.254: U$1.6 21.59,86.36 21.59,85.09 U$1.7 20.32,85.09 11.43,85.09 | 11.43,86.36 11.43,87.63 U$1.24 | V1.7 5.08,93.98 5.08,90.17 10.16,85.09 U$1.22 11.43,85.09 | 11.43,85.09 11.43,86.36 | 11.43,86.36 U$1.23 | R3.2 C2.1 | U$2.P$31 33.02,68.58 31.75,68.58 v26.67,63.5 | v25.4,68.58 25.4,76.2 JP1.16
  pour Bottom (isolate 0.305): 2.54,109.22 48.26,109.22 48.26,57.15 2.54,57.15
  pour Top (isolate 0.305): 2.54,109.22 48.26,109.22 48.26,57.15 2.54,57.15
GND1  (via drill 0.61)
  Top 0.254: U$4.P$10 U$4.P$9 83.82,88.9 83.82,86.36 U$4.P$15 U$4.P$17 83.82,78.74 83.82,73.66 | U$4.P$31 83.82,66.04 83.82,73.66 | 83.82,73.66 U$4.P$21 | C3.2 C4.1 57.15,67.31 57.15,95.25 V2.7 | JP2.16 63.5,66.04 63.5,63.5 R6.2 | v74.93,63.5 73.66,64.77 v73.66,68.58
  Bottom 0.254: U$3.6 69.85,86.36 69.85,85.09 U$3.7 68.58,85.09 59.69,85.09 | 59.69,86.36 59.69,87.63 U$3.24 | V2.7 53.34,93.98 53.34,90.17 58.42,85.09 U$3.22 59.69,85.09 | 59.69,85.09 59.69,86.36 | 59.69,86.36 U$3.23 | R6.2 C4.1 | U$4.P$31 81.28,68.58 80.01,68.58 v74.93,63.5 | v73.66,68.58 73.66,76.2 JP2.16
  pour Bottom (isolate 0.305): 50.8,109.22 96.52,109.22 96.52,57.15 50.8,57.15
  pour Top (isolate 0.305): 50.8,109.22 96.52,109.22 96.52,57.15 50.8,57.15
GND2  (via drill 0.61)
  Top 0.254: U$6.P$10 U$6.P$9 35.56,34.29 35.56,31.75 U$6.P$15 U$6.P$17 35.56,24.13 35.56,19.05 | U$6.P$31 35.56,11.43 35.56,19.05 | 35.56,19.05 U$6.P$21 | C5.2 C6.1 8.89,12.7 8.89,40.64 V3.7 | JP3.16 15.24,11.43 15.24,8.89 R9.2 | v26.67,8.89 25.4,10.16 v25.4,13.97
  Bottom 0.254: U$5.6 21.59,31.75 21.59,30.48 U$5.7 20.32,30.48 11.43,30.48 | 11.43,31.75 11.43,33.02 U$5.24 | V3.7 5.08,39.37 5.08,35.56 10.16,30.48 U$5.22 11.43,30.48 | 11.43,30.48 11.43,31.75 | 11.43,31.75 U$5.23 | R9.2 C6.1 | U$6.P$31 33.02,13.97 31.75,13.97 v26.67,8.89 | v25.4,13.97 25.4,21.59 JP3.16
  pour Bottom (isolate 0.305): 2.54,54.61 48.26,54.61 48.26,2.54 2.54,2.54
  pour Top (isolate 0.305): 2.54,54.61 48.26,54.61 48.26,2.54 2.54,2.54
GND3  (via drill 0.61)
  Top 0.254: U$8.P$10 U$8.P$9 83.82,34.29 83.82,31.75 U$8.P$15 U$8.P$17 83.82,24.13 83.82,19.05 | U$8.P$31 83.82,11.43 83.82,19.05 | 83.82,19.05 U$8.P$21 | C7.2 C8.1 57.15,12.7 57.15,40.64 V4.7 | JP4.16 63.5,11.43 63.5,8.89 R12.2 | v74.93,8.89 73.66,10.16 v73.66,13.97
  Bottom 0.254: U$7.6 69.85,31.75 69.85,30.48 U$7.7 68.58,30.48 59.69,30.48 | 59.69,31.75 59.69,33.02 U$7.24 | V4.7 53.34,39.37 53.34,35.56 58.42,30.48 U$7.22 59.69,30.48 | 59.69,30.48 59.69,31.75 | 59.69,31.75 U$7.23 | R12.2 C8.1 | U$8.P$31 81.28,13.97 80.01,13.97 v74.93,8.89 | v73.66,13.97 73.66,21.59 JP4.16
  pour Bottom (isolate 0.305): 50.8,54.61 96.52,54.61 96.52,2.54 50.8,2.54
  pour Top (isolate 0.305): 50.8,54.61 96.52,54.61 96.52,2.54 50.8,2.54
HORIZONTAL_REFERENCE  (via drill 0.61)
  Top 0.254: U$2.P$14 44.45,90.17 v44.45,102.87 | v41.91,105.41 36.83,105.41 35.56,106.68 25.4,106.68 25.4,101.6 22.86,99.06 V1.1
  Bottom 0.254: V1.1 30.48,96.52 33.02,93.98 33.02,91.44 30.48,88.9 27.94,88.9 27.94,86.36 JP1.9 | v41.91,105.41 v44.45,102.87
HORIZONTAL_REFERENCE1  (via drill 0.61)
  Top 0.254: U$4.P$14 92.71,90.17 v92.71,102.87 | v90.17,105.41 85.09,105.41 83.82,106.68 73.66,106.68 73.66,101.6 71.12,99.06 V2.1
  Bottom 0.254: V2.1 78.74,96.52 81.28,93.98 81.28,91.44 78.74,88.9 76.2,88.9 76.2,86.36 JP2.9 | v90.17,105.41 v92.71,102.87
HORIZONTAL_REFERENCE2  (via drill 0.61)
  Top 0.254: U$6.P$14 44.45,35.56 v44.45,48.26 | v41.91,50.8 36.83,50.8 35.56,52.07 25.4,52.07 25.4,46.99 22.86,44.45 V3.1
  Bottom 0.254: V3.1 30.48,41.91 33.02,39.37 33.02,36.83 30.48,34.29 27.94,34.29 27.94,31.75 JP3.9 | v41.91,50.8 v44.45,48.26
HORIZONTAL_REFERENCE3  (via drill 0.61)
  Top 0.254: U$8.P$14 92.71,35.56 v92.71,48.26 | v90.17,50.8 85.09,50.8 83.82,52.07 73.66,52.07 73.66,46.99 71.12,44.45 V4.1
  Bottom 0.254: V4.1 78.74,41.91 81.28,39.37 81.28,36.83 78.74,34.29 76.2,34.29 76.2,31.75 JP4.9 | v90.17,50.8 v92.71,48.26
N$1  (via drill 0.61)
  Top 0.254: JP1.20 27.94,71.12 v27.94,63.5 | v31.75,63.5 v34.29,63.5
  Bottom 0.254: v27.94,63.5 v31.75,63.5 | v34.29,63.5 36.83,60.96 38.1,60.96 U$2.P$32
N$2
  Bottom 0.254: V1.3 15.24,93.98 15.24,90.17 17.78,87.63 20.32,87.63 U$1.5
N$3  (via drill 0.61)
  Top 0.254: v13.97,69.85 24.13,80.01 v24.13,82.55
  Bottom 0.254: U$2.P$18 46.99,74.93 46.99,66.04 39.37,58.42 22.86,58.42 15.24,66.04 15.24,68.58 v13.97,69.85 | v24.13,82.55 21.59,82.55 U$1.9
N$4  (via drill 1.5 pad 1.78)
  other vias: 5.08,106.68
N$5  (via drill 1.5 pad 1.78)
  other vias: 45.72,106.68
N$6  (via drill 1.5 pad 1.78)
  other vias: 5.08,59.69
N$7  (via drill 1.5 pad 1.78)
  other vias: 45.72,59.69
N$8
  pour Bottom (isolate 0.305): 2.54,109.22 48.26,109.22 48.26,57.15 2.54,57.15
N$9
  pour Top (isolate 0.305): 2.54,109.22 48.26,109.22 48.26,57.15 2.54,57.15
N$10
  Bottom 0.254: C2.2 10.16,71.12 5.08,76.2 5.08,78.74 7.62,81.28 10.16,81.28 U$1.19
N$11
  Bottom 0.254: V2.3 63.5,93.98 63.5,90.17 66.04,87.63 68.58,87.63 U$3.5
N$12  (via drill 0.61)
  Top 0.254: v62.23,69.85 72.39,80.01 v72.39,82.55
  Bottom 0.254: U$4.P$18 95.25,74.93 95.25,66.04 87.63,58.42 71.12,58.42 63.5,66.04 63.5,68.58 v62.23,69.85 | v72.39,82.55 69.85,82.55 U$3.9
N$13
  Bottom 0.254: C4.2 58.42,71.12 53.34,76.2 53.34,78.74 55.88,81.28 58.42,81.28 U$3.19
N$14  (via drill 0.61)
  Top 0.254: JP2.20 76.2,71.12 v76.2,63.5 | v80.01,63.5 v82.55,63.5
  Bottom 0.254: v76.2,63.5 v80.01,63.5 | v82.55,63.5 85.09,60.96 86.36,60.96 U$4.P$32
N$15  (via drill 1.5 pad 1.78)
  other vias: 53.34,106.68
N$16  (via drill 1.5 pad 1.78)
  other vias: 93.98,106.68
N$17  (via drill 1.5 pad 1.78)
  other vias: 53.34,59.69
N$18  (via drill 1.5 pad 1.78)
  other vias: 93.98,59.69
N$19
  pour Bottom (isolate 0.305): 50.8,109.22 96.52,109.22 96.52,57.15 50.8,57.15
N$20
  pour Top (isolate 0.305): 50.8,109.22 96.52,109.22 96.52,57.15 50.8,57.15
N$21
  Bottom 0.254: V3.3 15.24,39.37 15.24,35.56 17.78,33.02 20.32,33.02 U$5.5
N$22  (via drill 0.61)
  Top 0.254: v13.97,15.24 24.13,25.4 v24.13,27.94
  Bottom 0.254: U$6.P$18 46.99,20.32 46.99,11.43 39.37,3.81 22.86,3.81 15.24,11.43 15.24,13.97 v13.97,15.24 | v24.13,27.94 21.59,27.94 U$5.9
N$23
  Bottom 0.254: C6.2 10.16,16.51 5.08,21.59 5.08,24.13 7.62,26.67 10.16,26.67 U$5.19
N$24  (via drill 0.61)
  Top 0.254: JP3.20 27.94,16.51 v27.94,8.89 | v31.75,8.89 v34.29,8.89
  Bottom 0.254: v27.94,8.89 v31.75,8.89 | v34.29,8.89 36.83,6.35 38.1,6.35 U$6.P$32
N$25  (via drill 1.5 pad 1.78)
  other vias: 5.08,52.07
N$26  (via drill 1.5 pad 1.78)
  other vias: 45.72,52.07
N$27  (via drill 1.5 pad 1.78)
  other vias: 5.08,5.08
N$28  (via drill 1.5 pad 1.78)
  other vias: 45.72,5.08
N$29
  pour Bottom (isolate 0.305): 2.54,54.61 48.26,54.61 48.26,2.54 2.54,2.54
N$30
  pour Top (isolate 0.305): 2.54,54.61 48.26,54.61 48.26,2.54 2.54,2.54
N$31
  Bottom 0.254: V4.3 63.5,39.37 63.5,35.56 66.04,33.02 68.58,33.02 U$7.5
N$32  (via drill 0.61)
  Top 0.254: v62.23,15.24 72.39,25.4 v72.39,27.94
  Bottom 0.254: U$8.P$18 95.25,20.32 95.25,11.43 87.63,3.81 71.12,3.81 63.5,11.43 63.5,13.97 v62.23,15.24 | v72.39,27.94 69.85,27.94 U$7.9
N$33
  Bottom 0.254: C8.2 58.42,16.51 53.34,21.59 53.34,24.13 55.88,26.67 58.42,26.67 U$7.19
N$34  (via drill 0.61)
  Top 0.254: JP4.20 76.2,16.51 v76.2,8.89 | v80.01,8.89 v82.55,8.89
  Bottom 0.254: v76.2,8.89 v80.01,8.89 | v82.55,8.89 85.09,6.35 86.36,6.35 U$8.P$32
N$35  (via drill 1.5 pad 1.78)
  other vias: 53.34,52.07
N$36  (via drill 1.5 pad 1.78)
  other vias: 93.98,52.07
N$37  (via drill 1.5 pad 1.78)
  other vias: 53.34,5.08
N$38  (via drill 1.5 pad 1.78)
  other vias: 93.98,5.08
N$39
  pour Bottom (isolate 0.305): 50.8,54.61 96.52,54.61 96.52,2.54 50.8,2.54
N$40
  pour Top (isolate 0.305): 50.8,54.61 96.52,54.61 96.52,2.54 50.8,2.54
OV6620_FODD  (via drill 0.61)
  Top 0.254: v33.02,85.09 34.29,86.36 34.29,100.33 36.83,102.87 v35.56,104.14 | v38.1,106.68 43.18,106.68 43.18,91.44 U$2.P$12
  Bottom 0.254: JP1.12 27.94,83.82 31.75,83.82 v33.02,85.09 | v35.56,104.14 v38.1,106.68
OV6620_FODD1  (via drill 0.61)
  Top 0.254: v81.28,85.09 82.55,86.36 82.55,100.33 85.09,102.87 v83.82,104.14 | v86.36,106.68 91.44,106.68 91.44,91.44 U$4.P$12
  Bottom 0.254: JP2.12 76.2,83.82 80.01,83.82 v81.28,85.09 | v83.82,104.14 v86.36,106.68
OV6620_FODD2  (via drill 0.61)
  Top 0.254: v33.02,30.48 34.29,31.75 34.29,45.72 36.83,48.26 v35.56,49.53 | v38.1,52.07 43.18,52.07 43.18,36.83 U$6.P$12
  Bottom 0.254: JP3.12 27.94,29.21 31.75,29.21 v33.02,30.48 | v35.56,49.53 v38.1,52.07
OV6620_FODD3  (via drill 0.61)
  Top 0.254: v81.28,30.48 82.55,31.75 82.55,45.72 85.09,48.26 v83.82,49.53 | v86.36,52.07 91.44,52.07 91.44,36.83 U$8.P$12
  Bottom 0.254: JP4.12 76.2,29.21 80.01,29.21 v81.28,30.48 | v83.82,49.53 v86.36,52.07
OV6620_SCL  (via drill 0.61)
  Top 0.254: R1.1 24.13,69.85 26.67,69.85 v26.67,64.77 | v34.29,80.01 JP1.13
  Bottom 0.254: v26.67,64.77 35.56,73.66 35.56,80.01 | 35.56,80.01 35.56,83.82 U$2.P$13 | 35.56,80.01 v34.29,80.01
OV6620_SCL1  (via drill 0.61)
  Top 0.254: R4.1 72.39,69.85 74.93,69.85 v74.93,64.77 | v82.55,80.01 JP2.13
  Bottom 0.254: v74.93,64.77 83.82,73.66 83.82,80.01 | 83.82,80.01 83.82,83.82 U$4.P$13 | 83.82,80.01 v82.55,80.01
OV6620_SCL2  (via drill 0.61)
  Top 0.254: R7.1 24.13,15.24 26.67,15.24 v26.67,10.16 | v34.29,25.4 JP3.13
  Bottom 0.254: v26.67,10.16 35.56,19.05 35.56,25.4 | 35.56,25.4 35.56,29.21 U$6.P$13 | 35.56,25.4 v34.29,25.4
OV6620_SCL3  (via drill 0.61)
  Top 0.254: R10.1 72.39,15.24 74.93,15.24 v74.93,10.16 | v82.55,25.4 JP4.13
  Bottom 0.254: v74.93,10.16 83.82,19.05 83.82,25.4 | 83.82,25.4 83.82,29.21 U$8.P$13 | 83.82,25.4 v82.55,25.4
OV6620_SDA
  Bottom 0.254: R2.1 24.13,64.77 31.75,72.39 31.75,80.01 30.48,81.28 | 30.48,81.28 JP1.11 | U$2.P$11 35.56,86.36 35.56,85.09 31.75,81.28 30.48,81.28
OV6620_SDA1
  Bottom 0.254: R5.1 72.39,64.77 80.01,72.39 80.01,80.01 78.74,81.28 | 78.74,81.28 JP2.11 | U$4.P$11 83.82,86.36 83.82,85.09 80.01,81.28 78.74,81.28
OV6620_SDA2
  Bottom 0.254: R8.1 24.13,10.16 31.75,17.78 31.75,25.4 30.48,26.67 | 30.48,26.67 JP3.11 | U$6.P$11 35.56,31.75 35.56,30.48 31.75,26.67 30.48,26.67
OV6620_SDA3
  Bottom 0.254: R11.1 72.39,10.16 80.01,17.78 80.01,25.4 78.74,26.67 | 78.74,26.67 JP4.11 | U$8.P$11 83.82,31.75 83.82,30.48 80.01,26.67 78.74,26.67
VCC  (via drill 0.61)
  Top 0.254: U$2.P$20 U$2.P$22 43.18,73.66 43.18,63.5 40.64,60.96 30.48,60.96 30.48,76.2 JP1.15 27.94,78.74 v27.94,81.28 | 11.43,62.23 R2.2 R1.2 | C1.1 11.43,62.23 | V1.14 19.05,100.33 19.05,95.25 17.78,93.98 17.78,92.71 16.51,91.44 15.24,91.44 13.97,92.71 11.43,92.71 v11.43,74.93 11.43,62.23
  Bottom 0.254: v27.94,81.28 21.59,81.28 U$1.10 | JP1.15 27.94,76.2 27.94,69.85 24.13,66.04 20.32,66.04 v11.43,74.93
VCC1  (via drill 0.61)
  Top 0.254: U$4.P$20 U$4.P$22 91.44,73.66 91.44,63.5 88.9,60.96 78.74,60.96 78.74,76.2 JP2.15 76.2,78.74 v76.2,81.28 | 59.69,62.23 R5.2 R4.2 | C3.1 59.69,62.23 | V2.14 67.31,100.33 67.31,95.25 66.04,93.98 66.04,92.71 64.77,91.44 63.5,91.44 62.23,92.71 59.69,92.71 v59.69,74.93 59.69,62.23
  Bottom 0.254: v76.2,81.28 69.85,81.28 U$3.10 | JP2.15 76.2,76.2 76.2,69.85 72.39,66.04 68.58,66.04 v59.69,74.93
VCC2  (via drill 0.61)
  Top 0.254: U$6.P$20 U$6.P$22 43.18,19.05 43.18,8.89 40.64,6.35 30.48,6.35 30.48,21.59 JP3.15 27.94,24.13 v27.94,26.67 | 11.43,7.62 R8.2 R7.2 | C5.1 11.43,7.62 | V3.14 19.05,45.72 19.05,40.64 17.78,39.37 17.78,38.1 16.51,36.83 15.24,36.83 13.97,38.1 11.43,38.1 v11.43,20.32 11.43,7.62
  Bottom 0.254: v27.94,26.67 21.59,26.67 U$5.10 | JP3.15 27.94,21.59 27.94,15.24 24.13,11.43 20.32,11.43 v11.43,20.32
VCC3  (via drill 0.61)
  Top 0.254: U$8.P$20 U$8.P$22 91.44,19.05 91.44,8.89 88.9,6.35 78.74,6.35 78.74,21.59 JP4.15 76.2,24.13 v76.2,26.67 | 59.69,7.62 R11.2 R10.2 | C7.1 59.69,7.62 | V4.14 67.31,45.72 67.31,40.64 66.04,39.37 66.04,38.1 64.77,36.83 63.5,36.83 62.23,38.1 59.69,38.1 v59.69,20.32 59.69,7.62
  Bottom 0.254: v76.2,26.67 69.85,26.67 U$7.10 | JP4.15 76.2,21.59 76.2,15.24 72.39,11.43 68.58,11.43 v59.69,20.32
VERTICAL_SYNCRONIZATION  (via drill 0.61)
  Top 0.254: v35.56,102.87 33.02,100.33 33.02,88.9 30.48,86.36 26.67,86.36 JP1.10
  Bottom 0.254: JP1.10 24.13,85.09 22.86,83.82 21.59,83.82 U$1.8 | U$2.P$16 43.18,86.36 44.45,86.36 45.72,87.63 45.72,100.33 40.64,105.41 38.1,105.41 v35.56,102.87
VERTICAL_SYNCRONIZATION1  (via drill 0.61)
  Top 0.254: v83.82,102.87 81.28,100.33 81.28,88.9 78.74,86.36 74.93,86.36 JP2.10
  Bottom 0.254: JP2.10 72.39,85.09 71.12,83.82 69.85,83.82 U$3.8 | U$4.P$16 91.44,86.36 92.71,86.36 93.98,87.63 93.98,100.33 88.9,105.41 86.36,105.41 v83.82,102.87
VERTICAL_SYNCRONIZATION2  (via drill 0.61)
  Top 0.254: v35.56,48.26 33.02,45.72 33.02,34.29 30.48,31.75 26.67,31.75 JP3.10
  Bottom 0.254: JP3.10 24.13,30.48 22.86,29.21 21.59,29.21 U$5.8 | U$6.P$16 43.18,31.75 44.45,31.75 45.72,33.02 45.72,45.72 40.64,50.8 38.1,50.8 v35.56,48.26
VERTICAL_SYNCRONIZATION3  (via drill 0.61)
  Top 0.254: v83.82,48.26 81.28,45.72 81.28,34.29 78.74,31.75 74.93,31.75 JP4.10
  Bottom 0.254: JP4.10 72.39,30.48 71.12,29.21 69.85,29.21 U$7.8 | U$8.P$16 91.44,31.75 92.71,31.75 93.98,33.02 93.98,45.72 88.9,50.8 86.36,50.8 v83.82,48.26